# Altium PCB Copy of PCB_First.PcbDoc
Units mm, origin at the board's own origin, x right, y up, seen from the top; angles counter-clockwise.
Board outline 52 x 30 mm, 4 copper layers (Top Layer, Signal Layer 1, Signal Layer 2, Bottom Layer), stack 0.778 mm thick; 61 components, 52 nets, 200 pads, 186 vias.
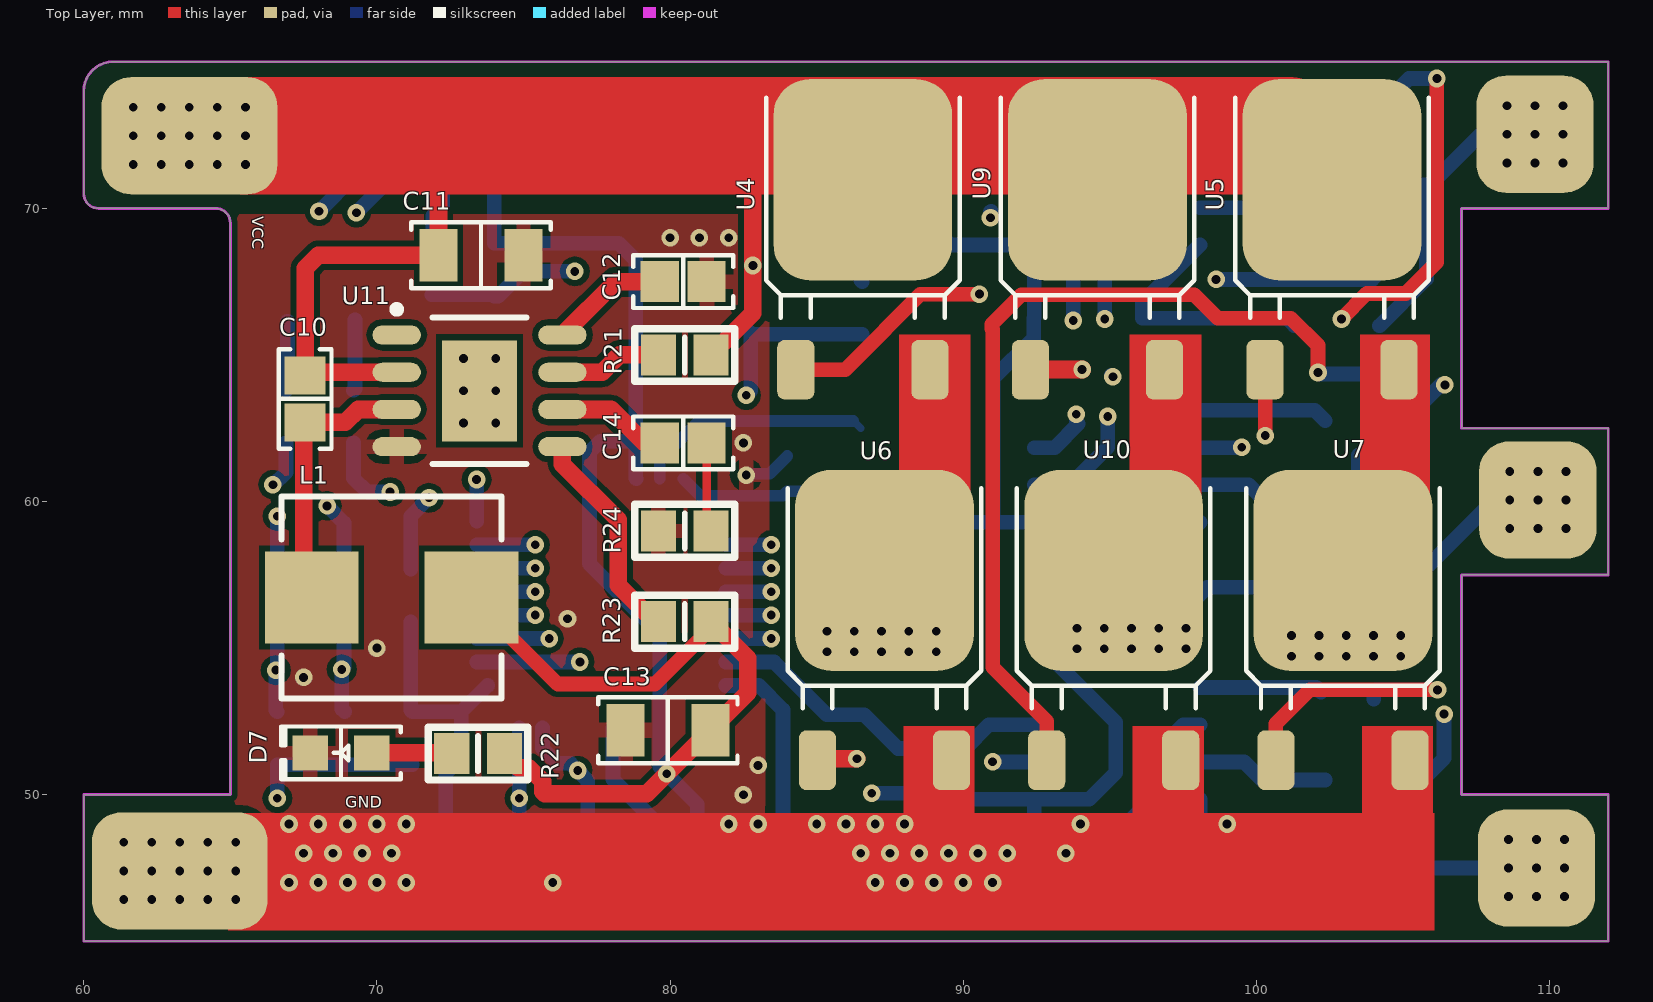
[diagram p0: Top Layer view]
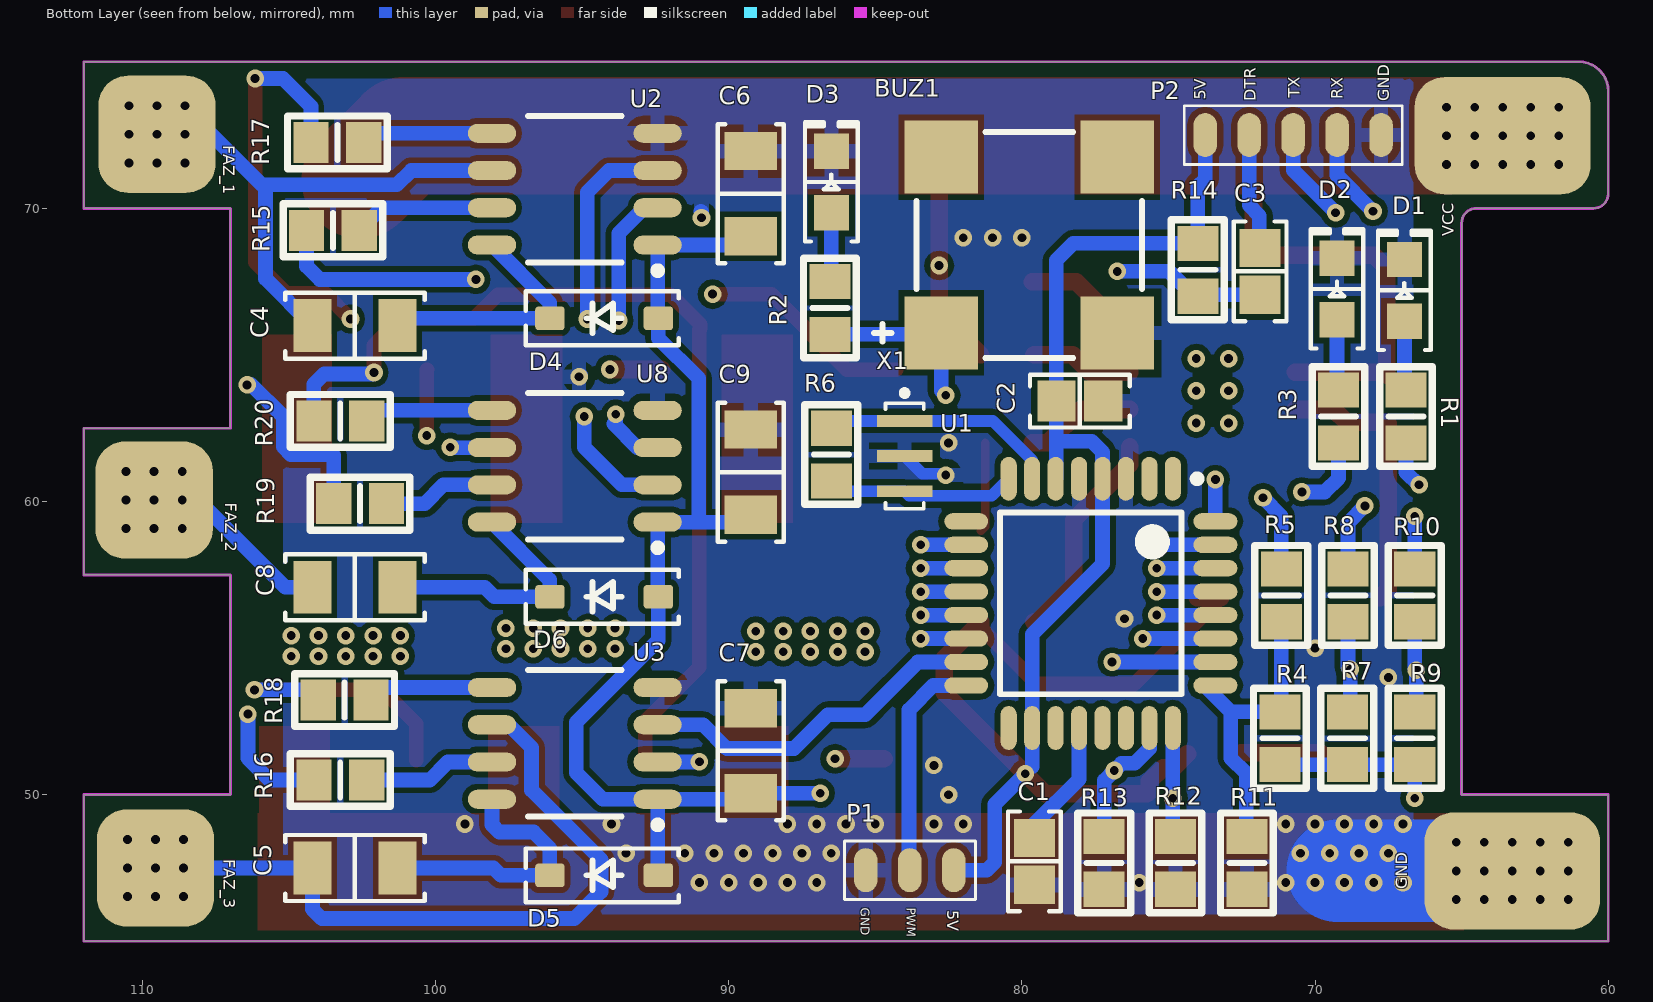
[diagram p1: Bottom Layer view, seen from below]
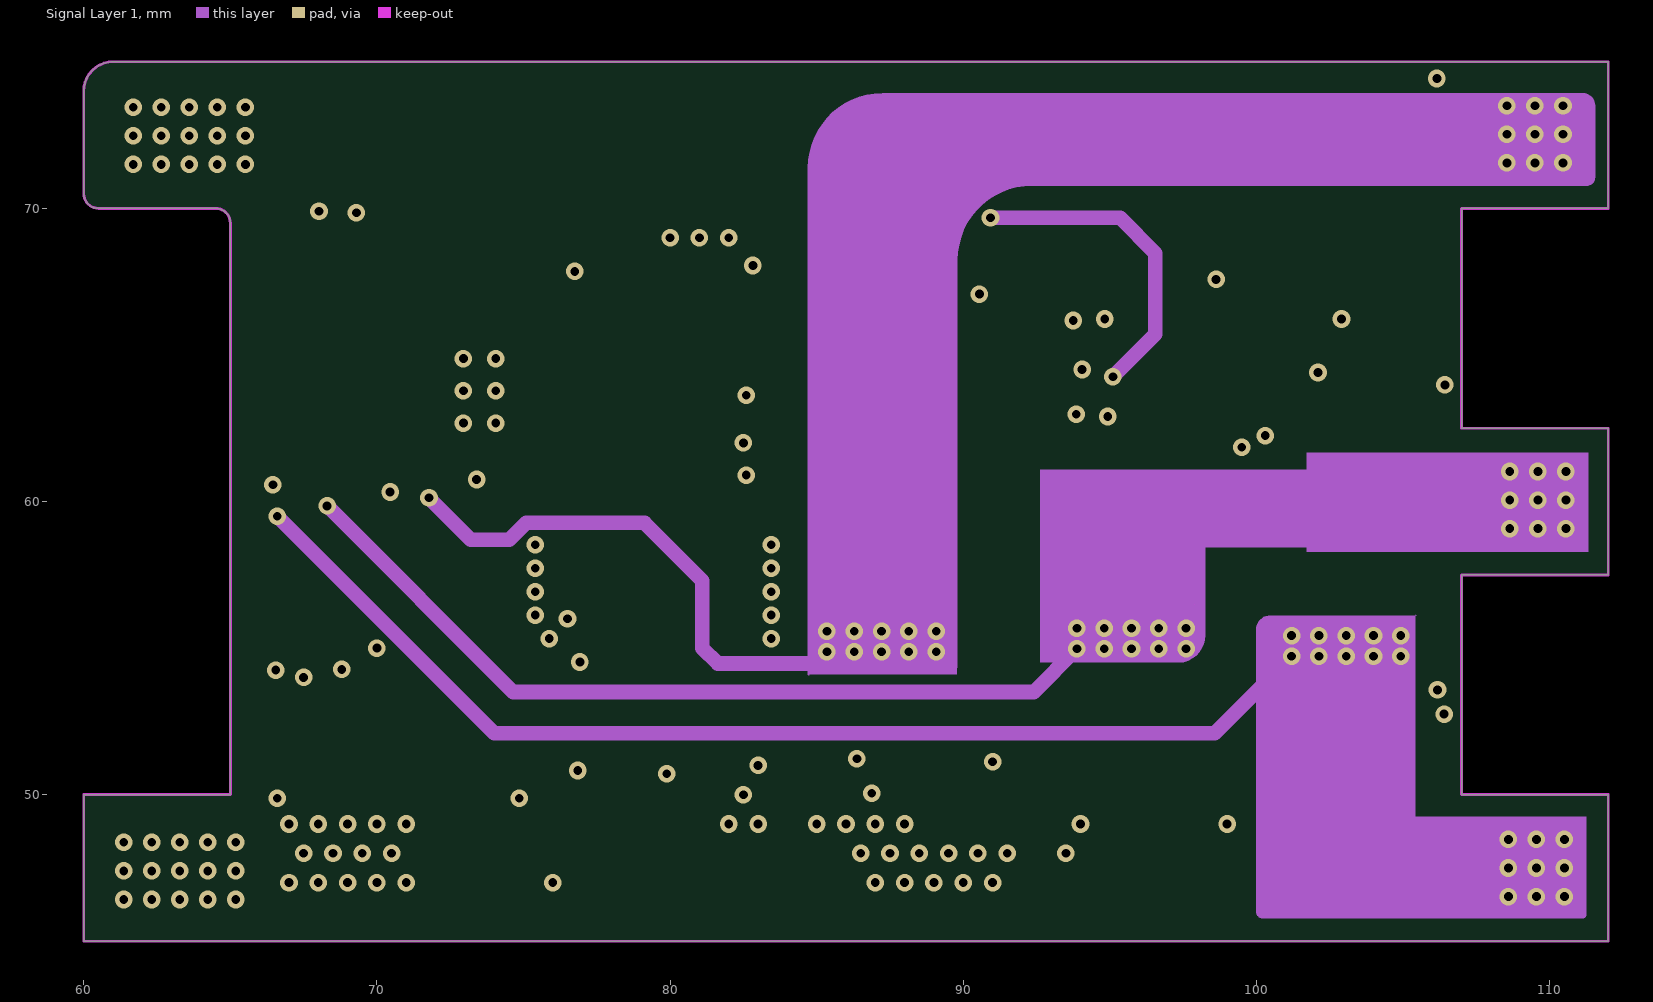
[diagram p2: Signal Layer 1]
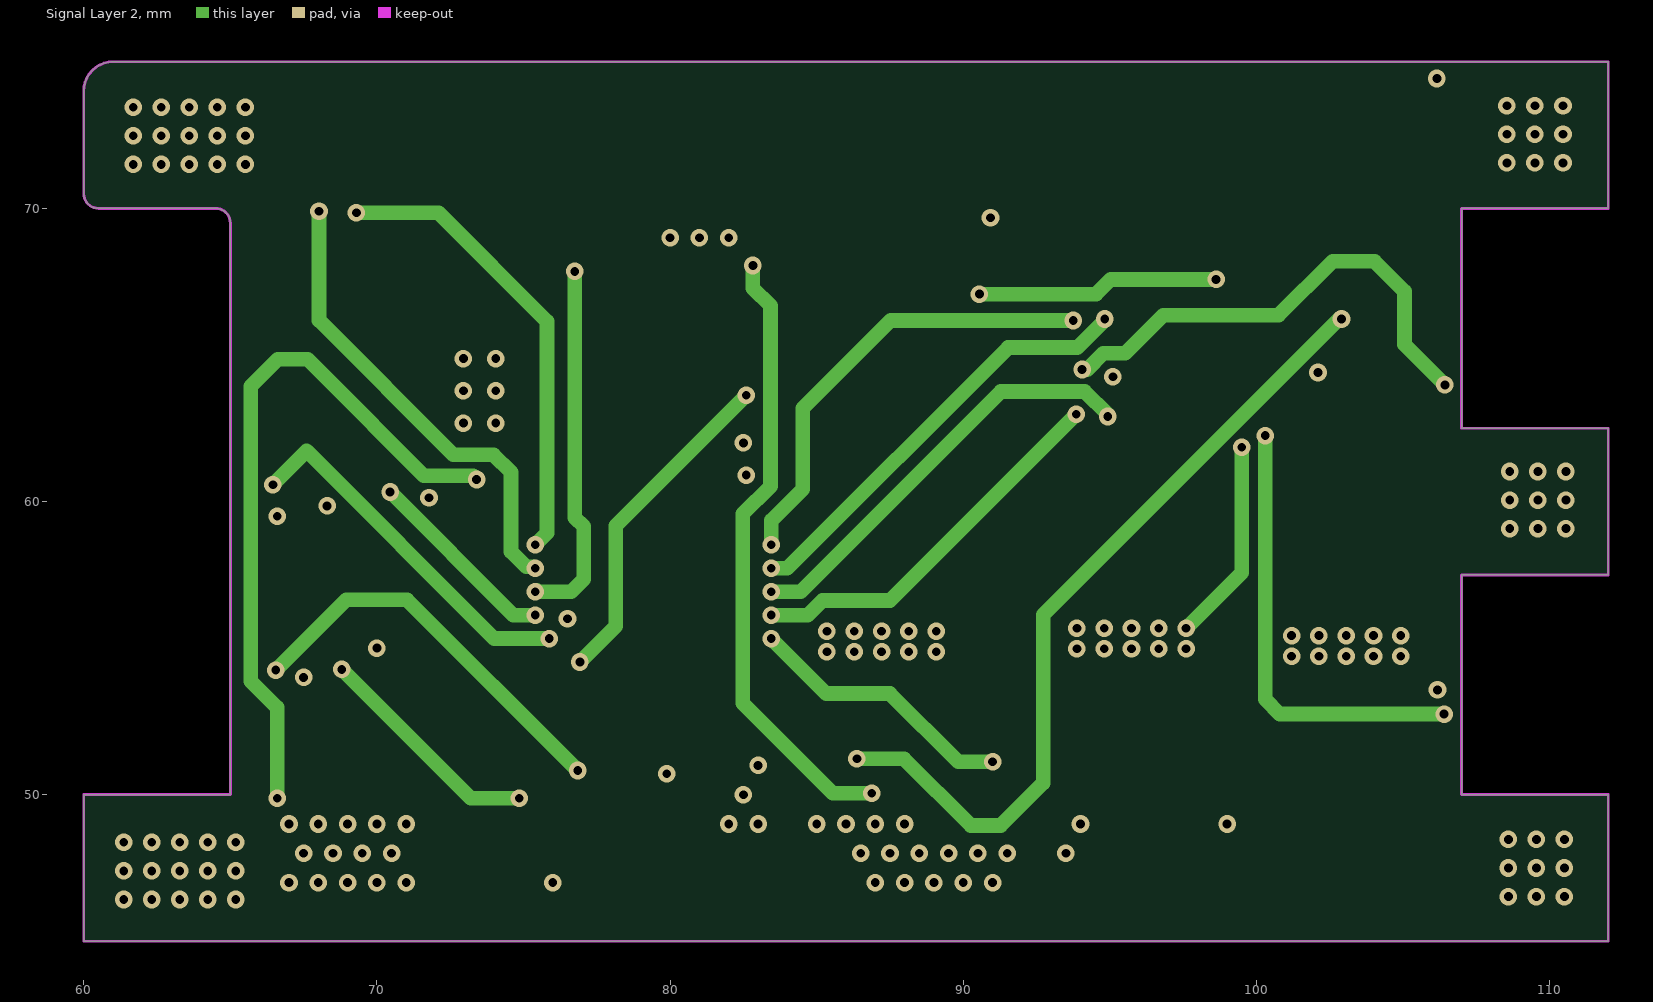
[diagram p3: Signal Layer 2]

## Layer stack, top to bottom
Top Solder: solder mask 0.0102, Solder Resist, Dk 3.5
Top Layer: signal copper 0.0356
Dielectric 1: core 0.254, FR-4, Dk 4.2
Signal Layer 1: signal copper 0.036
Dielectric 3: prepreg 0.127, Dk 4.2
Signal Layer 2: signal copper 0.036
Dielectric 2: core 0.254, Dk 4.2
Bottom Layer: signal copper 0.0356
Bottom Solder: solder mask 0.0102, Solder Resist, Dk 3.5

## Board outline
60,45 60,50 65,50 65,69.5 ccw(c64.5,69.5) 64.5,70 60.5,70 cw(c60.5,70.5) 60,70.5 60,74 cw(c61,74) 61,75 112,75 112,70 107,70 107,62.5 112,62.5 112,57.5 107,57.5 107,50 112,50 112,45

## Design rules (kind name [scope] priority, off if disabled: settings)
Clearance [All] p1: gap=0.2 ignorepadtopadclearanceinfootprint=FALSE except(0: Arc-Hole Track-Hole SMDPad-Hole THPad-Hole Via-Hole Fill-Hole Poly-Hole Region-Hole Text-Hole)
PolygonConnect [All] p1: connectstyle=Relief reliefconductorwidth=0.5 reliefentries=4 polygonreliefangle="90 Angle" airgapwidth=0.254
RoutingVias [All] p1: holewidth=0.3 width=0.6 viastyle="Through Hole" minholewidth=0.25 minwidth=0.5 maxholewidth=2.5 maxwidth=5
SolderMaskExpansion [All] p1: expansion=0.102
Width [All] p1: maxlimit=10 minlimit=0.1 preferedwidth=0.3 midlayer1_minwidth=0.254 midlayer1_prefwidth=0.254 midlayer2_minwidth=0.254 midlayer2_prefwidth=0.254 minimp=50.000000 maximp=50.000000 favimp=50.000000
30 further rules are at their usual default settings.

## Classes and differential pairs
component class Power: C10 C11 C12 C13 C14 D7 L1 R21 R22 R23 R24 U11
component class Driver: C4 C5 C6 C7 C8 C9 D4 D5 D6 R15 R16 R17 R18 R19 R20 U2 U3 U4 U5 U6 U7 U8 U9 U10
component class Atmega328p: BUZ1 C1 C2 C3 D1 D2 D3 P1 P2 R1 R2 R3 R4 R5 R6 R7 R8 R9 R10 R11 R12 R13 R14 U1 X1

## Components (designator, comment, footprint, x,y, rotation, side; value= is the part's Value field where it differs from the comment)
BUZ1 "BUZZER MAGN 3.6V 7.5X7.5MM SMD" "BUZ: CMT-7525" 79.75,68.75 r180 bottom
C1 "CAP CER 0.1UF 50V X7R 0805" "CAP 0805/2012" 79.575,47.727 r90 bottom
C2 "CAP CER 0.1UF 50V X7R 0805" "CAP 0805/2012" 78.025,63.425 r0 bottom
C3 "CAP CER 0.1UF 50V X7R 0805" "CAP 0805/2012" 71.875,67.852 r270 bottom
C4 "CAP CER 2.2UF 50V X5R 1206" "CAP 1206/3216" 102.75,66 r180 bottom
C5 "CAP CER 2.2UF 50V X5R 1206" "CAP 1206/3216" 102.75,47.5 r180 bottom
C6 "CAP CER 10UF 50V X5R 1206" "CAP 1206/3216" 89.25,70.5 r270 bottom
C7 "CAP CER 10UF 50V X5R 1206" "CAP 1206/3216" 89.25,51.5 r270 bottom
C8 "CAP CER 2.2UF 50V X5R 1206" "CAP 1206/3216" 102.75,57.075 r180 bottom
C9 "CAP CER 10UF 50V X5R 1206" "CAP 1206/3216" 89.25,61 r270 bottom
C10 "CAP CER 10000PF 50V X7R 0805" "CAP 0805/2012" 67.55,63.5 r90 top
C11 "CAP CER 10UF 50V X5R 1206" "CAP 1206/3216" 73.55,68.4 r180 top
C12 "CAP CER 0.1UF 50V X7R 0805" "CAP 0805/2012" 80.448,67.5 r180 top
C13 "CAP CERAMIC 22UF 16V X7S 20% PAD" "CAP 1206/3216" 79.925,52.2 r0 top
C14 "CAP CER 3900PF 50V X7R 0805" "CAP 0805/2012" 80.448,62 r180 top
D1 "Red 645nm LED Indication - Discrete 1.8V 0805" "SMD: LED 0805/2012 RED" 66.952,67.2 r90 bottom
D2 "Red 645nm LED Indication - Discrete 1.8V 0805" "SMD: LED 0805/2012 RED" 69.252,67.25 r90 bottom
D3 "Red 645nm LED Indication - Discrete 1.8V 0805" "SMD: LED 0805/2012 RED" 86.5,70.9 r90 bottom
D4 "1N4148 Diyot" SOD-123 94.25,66.25 r0 bottom
D5 "1N4148 Diyot" SOD-123 94.25,47.25 r0 bottom
D6 "1N4148 Diyot" SOD-123 94.25,56.75 r0 bottom
D7 "Red 645nm LED Indication - Discrete 1.8V 0805" "SMD: LED 0805/2012 RED" 68.775,51.425 r180 top
L1 "FIXED IND 10UH 4A 68 MOHM SMD" ASPI-0630LR-100M-T15 70.5,56.725 r0 top
P1 "WR-PHD 2.54 mm Angled Socket Header" PWM_CONN 83.825,47.425 r0 bottom
P2 "WR-PHD 2.54 mm Angled Socket Header" TTL_CONN_5 70.75,72.5 r180 bottom
R1 "RES SMD 100 OHM 1% 1/8W 0805" RES_0805 66.9,62.9 r90 bottom
R2 "RES SMD 100 OHM 1% 1/8W 0805" RES_0805 86.55,66.6 r270 bottom
R3 "RES SMD 100 OHM 1% 1/8W 0805" RES_0805 69.2,62.9 r90 bottom
R4 "RES SMD 33K OHM 1% 1/8W 0805" RES_0805 71.2,51.925 r90 bottom
R5 "RES SMD 33K OHM 1% 1/8W 0805" RES_0805 71.15,56.8 r90 bottom
R6 "RES SMD 10K OHM 1% 1/8W 0805" RES_0805 86.5,61.6 r270 bottom
R7 "RES SMD 33K OHM 1% 1/8W 0805" RES_0805 68.9,51.925 r90 bottom
R8 "RES SMD 33K OHM 1% 1/8W 0805" RES_0805 68.875,56.8 r90 bottom
R9 "RES SMD 33K OHM 1% 1/8W 0805" RES_0805 66.6,51.925 r90 bottom
R10 "RES SMD 33K OHM 1% 1/8W 0805" RES_0805 66.6,56.8 r90 bottom
R11 "RES SMD 10K OHM 1% 1/8W 0805" RES_0805 72.325,47.675 r90 bottom
R12 "RES SMD 10K OHM 1% 1/8W 0805" RES_0805 74.759,47.675 r90 bottom
R13 "RES SMD 10K OHM 1% 1/8W 0805" RES_0805 77.193,47.675 r90 bottom
R14 "RES SMD 10K OHM 1% 1/8W 0805" RES_0805 74,67.904 r90 bottom
R15 "RES SMD 100 OHM 1% 1/8W 0805" RES_0805 103.5,69.25 r0 bottom
R16 "RES SMD 100 OHM 1% 1/8W 0805" RES_0805 103.25,50.5 r0 bottom
R17 "RES SMD 100 OHM 1% 1/8W 0805" RES_0805 103.35,72.25 r0 bottom
R18 "RES SMD 100 OHM 1% 1/8W 0805" RES_0805 103.1,53.225 r0 bottom
R19 "RES SMD 100 OHM 1% 1/8W 0805" RES_0805 102.575,59.925 r0 bottom
R20 "RES SMD 100 OHM 1% 1/8W 0805" RES_0805 103.25,62.75 r0 bottom
R21 "RES SMD 100K OHM 1% 1/8W 0805" RES_0805 80.5,65 r0 top
R22 "RES SMD 100K OHM 1% 1/8W 0805" RES_0805 73.45,51.4 r180 top
R23 "RES SMD 44.2K OHM 1% 1/8W 0805" RES_0805 80.5,55.9 r0 top
R24 "RES SMD 6.8K OHM 1% 1/8W 0805" RES_0805 80.5,59 r0 top
U1 "IC MCU 8BIT 32KB FLASH 32TQFP" TQFP32 77.65,56.525 r270 bottom
U2 "IC GATE DRVR HALF-BRIDGE 8SOIC" SOIC8 95.25,70.655 r0 bottom
U3 "IC GATE DRVR HALF-BRIDGE 8SOIC" SOIC8 95.25,51.75 r0 bottom
U4 "MOSFET N-CH 30V 161A DPAK" DPAK 86.589,68.498 r90 top
U5 "MOSFET N-CH 30V 161A DPAK" DPAK 102.589,68.498 r90 top
U6 "MOSFET N-CH 30V 161A DPAK" DPAK 87.325,55.175 r90 top
U7 "MOSFET N-CH 30V 161A DPAK" DPAK 102.964,55.175 r90 top
U8 "IC GATE DRVR HALF-BRIDGE 8SOIC" SOIC8 95.25,61.202 r0 bottom
U9 "MOSFET N-CH 30V 161A DPAK" DPAK 94.589,68.498 r90 top
U10 "MOSFET N-CH 30V 161A DPAK" DPAK 95.145,55.175 r90 top
U11 "IC REG BUCK ADJUSTABLE 3A 8SOIC" SOIC8_PAD 73.5,63.775 r0 top
X1 "CERAMIC RES 16.0000MHZ 15PF SMD" CRYSTAL_16MHZ(CTSE16) 84,61.55 r270 bottom

## Footprints (in the part's own frame and the unit in brackets; to place one, negate y for a bottom-side part, rotate by r counter-clockwise, add the part's x,y. Pads: shape width x height; smd on the part's side, far side on the other; paste and mask are expansions set on the pad)
ASPI-0630LR-100M-T15 [mm]
  rect 3.2x3.15 smd: 1(-2.725,0) 2(2.725,0)
  silkscreen extent -3.75,-3.45 3.75,3.45, body extent -3.6,-3.32 3.6,3.33, height 3
"BUZ: CMT-7525" [mm]
  rect 2.5x2.5 smd: 0(-3,3) 0(3,3) 1(-3,-3) 2(3,-3)
  silkscreen extent -5.3,-3.85 3.85,3.85, body extent -3.75,-3.75 3.75,3.75, height 2.5
"CAP 0805/2012" [mm] "Chip Capacitor, 2-Leads, Body 2.00x1.20mm, IPC Medium Density"
  rect 1.3x1.4 smd: 1(-0.8,0) 2(0.8,0)
  silkscreen extent -1.7,-0.9 1.7,0.9, body extent -1,-0.64 1,0.64, height 1.26
"CAP 1206/3216" [mm] "Chip Capacitor, 2-Leads, Body 3.25x1.60mm, IPC Medium Density"
  rect 1.3x1.8 smd: 1(-1.45,0) 2(1.45,0)
  silkscreen extent -2.37,-1.12 2.37,1.12, body extent -1.6,-0.81 1.6,0.81, height 1.62
CRYSTAL_16MHZ(CTSE16) [mm]
  rect 0.4x1.9 smd: 1(-1.2,0) 2(0,0) 3(1.2,0)
  silkscreen extent -2.25,-0.65 1.8,0.65, body extent -1.6,-0.65 1.6,0.65, height 0.9
DPAK [mil] "D-PAK, 3-Pads, Body 6,47x6,54mm (max), IPC Medium Density"
  rrect40% 80x50 smd: 1(-157.48,90.55) 3(-157.48,-89.45)
  rrect40% 270x240 smd: 4(97.52,0.55)
  silkscreen extent -87,-129 208,131, body extent -174,-128 217,129, height 91
PWM_CONN [mm]
  oval 0.8x1.5 smd: 1(-1.5,0) 2(0,0) 3(1.5,0)
  silkscreen extent -2.25,-1 2.22,1
RES_0805 [mm]
  rect 1.2x1.4 smd: 1(-0.9,0) 2(0.9,0)
  silkscreen extent -1.7,-0.9 1.7,0.9, body extent -1.05,-0.67 1.05,0.68, height 0.6
"SMD: LED 0805/2012 RED" [mm] "Chip Diode, 2-Leads, Body 2.00x1.25mm, IPC Medium Density"
  rect 1.2x1.2 smd: 1(-1.05,0) 2(1.05,0)
  silkscreen extent -2.03,-0.9 2.03,0.9, body extent -1,-0.63 1,0.63, height 0.9
SOD-123 [mm] "SOD, 2-Leads, Body 1.55x3.70mm, IPC Medium Density"
  rrect25% 1x0.8 smd: 1(-1.85,0) 2(1.85,0)
  silkscreen extent -2.54,-0.92 2.67,0.92, body extent -1.95,-0.9 1.95,0.9, height 1.18
SOIC8 [mm] "SOIC, 8-Leads, Body 4,90x3,90mm, Pitch 1,27mm, Thermal Pad 3,45x2,56mm, IPC Low Density"
  oval 1.65x0.65 smd: 1(-2.825,1.905) 2(-2.825,0.635) 3(-2.825,-0.635) 4(-2.825,-1.905) 5(2.825,-1.905) 6(2.825,-0.635) 7(2.825,0.635) 8(2.825,1.905)
  silkscreen extent -2.95,-2.5 1.6,2.9, body extent -3,-2.5 3,2.5, height 1.7
SOIC8_PAD [mm] "SOIC, 8-Leads, Body 4,90x3,90mm, Pitch 1,27mm, Thermal Pad 3,45x2,56mm, IPC Low Density"
  oval 1.65x0.65 smd: 1(-2.825,1.905) 2(-2.825,0.635) 3(-2.825,-0.635) 4(-2.825,-1.905) 5(2.825,-1.905) 6(2.825,-0.635) 7(2.825,0.635) 8(2.825,1.905)
  rect 2.56x3.45 smd: 9(0,0)
  silkscreen extent -2.95,-2.5 1.6,2.9, body extent -3,-2.5 3,2.5, height 1.7
TQFP32 [mm] "TQFP, 32-Leads, Body 7,00x7,00mm, Pitch 0,80mm, IPC Medium Density"
  oval 1.5x0.55 smd: 1(-4.25,2.8) 2(-4.25,2) 3(-4.25,1.2) 4(-4.25,0.4) 5(-4.25,-0.4) 6(-4.25,-1.2) 7(-4.25,-2) 8(-4.25,-2.8) 17(4.25,-2.8) 18(4.25,-2) 19(4.25,-1.2) 20(4.25,-0.4) 21(4.25,0.4) 22(4.25,1.2) 23(4.25,2) 24(4.25,2.8)
  oval 0.55x1.5 smd: 9(-2.8,-4.25) 10(-2,-4.25) 11(-1.2,-4.25) 12(-0.4,-4.25) 13(0.4,-4.25) 14(1.2,-4.25) 15(2,-4.25) 16(2.8,-4.25) 25(2.8,4.25) 26(2,4.25) 27(1.2,4.25) 28(0.4,4.25) 29(-0.4,4.25) 30(-1.2,4.25) 31(-2,4.25) 32(-2.8,4.25)
  silkscreen extent -4.37,-3.1 3.1,3.75, body extent -4.51,-4.51 4.51,4.51, height 1
TTL_CONN_5 [mm]
  oval 0.8x1.5 smd: 1(-3,0) 2(-1.5,0) 3(0,0) 4(1.5,0) 5(3,0)
  silkscreen extent -3.71,-1 3.72,1

## Part data
BUZ1: library part Buzzer(CMT-7525-80-SMT-TR), "Buzzers Transducer, Externally Driven Magnetic 3.6V 100mA 2.73kHz 80dB @ 3.6V, 10cm Surface Mount Solder Pads", +Sicaklik=+85, -Sicaklik=-40, Cins=Buzzer, Deger=Buzzer, Kýlýf=Nonstandard, Lehim Yöntemi=SMD, MSL="1 (Unlimited)", Uretici Kodu=CMT-7525-80-SMT-TR
C1 C2 C3 C12: library part "100nF 50V 0805", "0.1µF ±10% 50V Ceramic Capacitor X7R 0805 (2012 Metric)", +Sicaklik=+125, -Sicaklik=-55, Cins=Kondansator, Deger="100nF 50V", Kýlýf=0805, Lehim Yöntemi=SMD, MSL="1 (Unlimited)", Uretici Kodu=CL21B104KBCNNNC
C4 C5 C8: library part "2.2uF 50V 1206", "2.2µF ±10% 50V Ceramic Capacitor X5R 1206 (3216 Metric)", +Sicaklik=+85, -Sicaklik=-55, Cins=Kondansator, Deger="2.2uF 50V", Kýlýf=1206, Lehim Yöntemi=SMD, MSL="1 (Unlimited)", Uretici Kodu=CL31A225KBHNNNE
C6 C7 C9 C11: library part "10uF 50V 1206", "10µF ±10% 50V Ceramic Capacitor X5R 1206 (3216 Metric)", +Sicaklik=+125, -Sicaklik=-55, Cins=Kondansator, Deger="10uF 50V", Kýlýf=1206, Lehim Yöntemi=SMD, MSL="1 (Unlimited)", Uretici Kodu=CL31A106KBHNNNE
C10: library part "10nF 50V 0805", "10000pF ±10% 50V Ceramic Capacitor X7R 0805 (2012 Metric)", +Sicaklik=+125, -Sicaklik=-55, Cins=Kondansator, Deger="10nF 50V", Kýlýf=0805, Lehim Yöntemi=SMD, MSL="1 (Unlimited)", Uretici Kodu=CL21B103KBANNNC
C13: library part "22uF 16V 1206", "22µF ±20% 16V Ceramic Capacitor X7S 1206 (3216 Metric)", +Sicaklik=+125, -Sicaklik=-55, Cins=Kondansator, Deger="22uF 16V", Kýlýf=1206, Lehim Yöntemi=SMD, MSL="1 (Unlimited)", Uretici Kodu=GRM31CC71C226ME11L
C14: library part "3.9nF 50V 0805", "3900pF ±10% 50V Ceramic Capacitor X7R 0805 (2012 Metric)", +Sicaklik=+125, -Sicaklik=-55, Cins=Kondansator, Deger="3.9nF 50V", Kýlýf=0805, Lehim Yöntemi=SMD, MSL="1 (Unlimited)", Uretici Kodu=CL21B392KBANNNC
D1 D2 D3 D7: library part LED_Kýrmýzý, "LED RED DIFFUSED 0805 SMD", +Sicaklik=+125, -Sicaklik=-40, Cins=LED, Deger="KIRMIZI LED", Kýlýf=0805, Lehim Yöntemi=SMD, MSL="1 (Unlimited)", Uretici Kodu="LH R974-LP-1"
D4 D5 D6: library part 1N4148, "DIODE GEN PURP 100V 150MA SOD123", +Sicaklik=+150, -Sicaklik=-65, Cins=Diyot, Deger=1N4148, Kýlýf=SOD123, Lehim Yöntemi=SMD, MSL="1 (Unlimited)", Uretici Kodu=1N4148W-TP
L1: library part "10uH 4A", "10µH Shielded Molded Inductor 4A 68mOhm Max Nonstandard", +Sicaklik=+125, -Sicaklik=-55, Cins=Bobin, Deger="10uH 4A", Kýlýf=Nonstandard, Lehim Yöntemi=SMD, MSL="1 (Unlimited)", Uretici Kodu=ASPI-0630LR-100M-T15
P1: library part HDR(1X3), +Sicaklik=+105, -Sicaklik=-40, Cins=Konnektor, Kýlýf="3POS 2.54MM", Lehim Yöntemi=MANUEL, MSL="1 (Unlimited)", Uretici Kodu=613003143121
P2: library part HDR(1X5), +Sicaklik=+105, -Sicaklik=-40, Cins=Konnektor, Kýlýf="5POS 2.54MM", Lehim Yöntemi=MANUEL, MSL="1 (Unlimited)", Uretici Kodu=613005143121
R1 R2 R3 R15 R16 R17 R18 R19 R20: library part "100R 0805", "100 Ohms ±1% 0.125W, 1/8W Chip Resistor 0805 (2012 Metric) Moisture Resistant Thick Film", +Sicaklik=+155, -Sicaklik=-55, Cins=Direnc, Deger=100R, Kýlýf=0805, Lehim Yöntemi=SMD, MSL="1 (Unlimited)", Uretici Kodu=RC0805FR-07100RL
R4 R5 R7 R8 R9 R10: library part "33K 0805", "33 kOhms ±1% 0.125W, 1/8W Chip Resistor 0805 (2012 Metric) Moisture Resistant Thick Film", +Sicaklik=+155, -Sicaklik=-55, Cins=Direnc, Deger=33K, Kýlýf=0805, Lehim Yöntemi=SMD, MSL="1 (Unlimited)", Uretici Kodu=RC0805FR-0733KL
R6 R11 R12 R13 R14: library part "10K 0805", "10 kOhms ±1% 0.125W, 1/8W Chip Resistor 0805 (2012 Metric) Moisture Resistant Thick Film", +Sicaklik=+155, -Sicaklik=-55, Cins=Direnc, Deger=10K, Kýlýf=0805, Lehim Yöntemi=SMD, MSL="1 (Unlimited)", Uretici Kodu=RC0805FR-0710KL
R21 R22: library part "100K 0805", "100 kOhms ±1% 0.125W, 1/8W Chip Resistor 0805 (2012 Metric) Moisture Resistant Thick Film", +Sicaklik=+155, -Sicaklik=-55, Cins=Direnc, Deger=100K, Kýlýf=0805, Lehim Yöntemi=SMD, MSL="1 (Unlimited)", Uretici Kodu=RC0805FR-07100KL
R23: library part "44.2K 0805", "44.2 kOhms ±1% 0.125W, 1/8W Chip Resistor 0805 (2012 Metric) Moisture Resistant Thick Film", +Sicaklik=+155, -Sicaklik=-55, Cins=Direnc, Deger=44.2K, Kýlýf=0805, Lehim Yöntemi=SMD, MSL="1 (Unlimited)", Uretici Kodu=RC0805FR-0744K2L
R24: library part "6.8K 0805", "6.8 kOhms ±1% 0.125W, 1/8W Chip Resistor 0805 (2012 Metric) Moisture Resistant Thick Film", +Sicaklik=+155, -Sicaklik=-55, Cins=Direnc, Deger=6.8K, Kýlýf=0805, Lehim Yöntemi=SMD, MSL="1 (Unlimited)", Uretici Kodu=RC0805FR-076K8L
U1: library part ATMEGA328P, "AVR AVR® ATmega Microcontroller IC 8-Bit 20MHz 32KB (16K x 16) FLASH 32-TQFP (7x7)", +Sicaklik=+85, -Sicaklik=-40, Cins=IC, Deger=ATMEGA328P, Kýlýf=32-TQFP, Lehim Yöntemi=SMD, MSL="3 (168 Hours)", Uretici Kodu=RC0805FR-07100RL
U2 U3 U8: library part IR2101, "Half-Bridge Gate Driver IC Non-Inverting 8-SOIC", +Sicaklik=+150, -Sicaklik=-40, Cins=IC, Deger=IR2101STRPBF, Kýlýf=8-SOIC, Lehim Yöntemi=SMD, MSL="2A (4 Weeks)", Uretici Kodu=IR2101STRPBF
U4 U5 U6 U7 U9 U10: library part IRLR7843, "N-Channel 30V 161A (Tc) 140W (Tc) Surface Mount D-Pak", +Sicaklik=+175, -Sicaklik=-55, Cins=MOSFET, Deger=IRLR7843TRPBF, Kýlýf=DPAK(TO-252-3), Lehim Yöntemi=SMD, MSL="1 (Unlimited)", Uretici Kodu=IRLR7843TRPBF
U11: library part MP2307DN, "Buck Switching Regulator IC Positive Adjustable 0.925V 1 Output 3A 8-SOIC (0.154\", 3.90mm Width) Exposed Pad", +Sicaklik=+85, -Sicaklik=-40, Cins=IC, Deger=MP2307DN, Kýlýf=8-SOIC, Lehim Yöntemi=SMD, MSL="2A (4 Weeks)", Uretici Kodu=MP2307DN-LF-Z
X1: library part "CRYSTAL 16.0000MHZ(CSTCE16M0V53-R0)", "16MHz Ceramic Resonator Built in Capacitor 15pF ±0.3%  -20°C ~ 80°C Surface Mount", +Sicaklik=+80, -Sicaklik=-20, Cins=Kristal, Deger="16 MHZ 15PF", Kýlýf=3-SMD, Lehim Yöntemi=SMD, MSL="1 (Unlimited)", Uretici Kodu=CSTCE16M0V53-R0

## Free pads (board coordinates)
  rrect50% 6x4 smd: ""(63.275,47.4) ""(63.6,72.475)
  rrect50% 6x4 smd far side: ""(63.275,47.4) ""(63.6,72.475)
  rrect50% 4x4 smd: ""(109.5,72.525) ""(109.55,47.5) ""(109.6,60.05)
  rrect50% 4x4 smd far side: ""(109.5,72.525) ""(109.55,47.5) ""(109.6,60.05)

## Via types
v1: diameter 0.6, hole 0.3, Top Layer to Bottom Layer, tented both sides, 136 vias
v2: diameter 0.6, hole 0.3, Top Layer to Bottom Layer, 50 vias

## Nets (pads, with @x,y where several pads share a name; then routed paths per layer and width w, separated by ;. In a path a pad name is that pad's centre, name@x,y a point inside that pad or via, vN(x,y) a via of type N, cw(c..) or ccw(c..) an arc to the next point about the centre after c; other vN are vias at no path point)
+5V: C2.2 C13.2 L1.2 P1.1 P2.1 R14.2 R22.1 R23.2 U1.4 U1.6 U1.18 | length 59.4
  Top Layer w0.5: L1.2 76.175,53.775 79.482,53.775 R23.2@81.4,55.693
  Top Layer w0.6: L1.2 L1.2@74.025,56.725 ; R22.1 74.825,50.925 75.181,50.925 75.654,50.453 75.654,50.096 75.725,50.025 79.2,50.025 v1(79.887,50.712) C13.2 82.65,53.475 82.65,54.65 R23.2 R23.2@81.4,55.693
  Bottom Layer w0.5: P2.1 73.75,71 74,70.75 R14.2 78.246,68.804 78.825,68.225 C2.2 78.825,62.05 ; U1.6 78.825,60.8 78.825,62.05 ; 79.65,50.95 U1.18 79.65,55.475 77.25,57.875 U1.4 77.25,61.675 77.625,62.05 78.825,62.05 ; v1(79.887,50.712) 80.925,49.675 80.925,47.7 81.2,47.425 P1.1
A0: R9.2 R10.1 R13.2 U1.23 | length 21.5
  Signal Layer 2 w0.5: v1(66.55,54.25) 68.95,56.65 71.025,56.65 v1(76.85,50.825)
  Bottom Layer w0.5: R9.2 66.55,52.875 v1(66.55,54.25) 66.6,54.3 R10.1@66.6,55.85 ; R10.1 R10.1@66.6,55.85 ; R10.1@66.65,55.9 R10.1@66.6,55.85 ; U1.23 75.65,51.575 76.15,51.075 76.6,51.075 v1(76.85,50.825) 77.193,50.482 R13.2
A1: R7.2 R8.1 R12.2 U1.24 | length 15
  Signal Layer 2 w0.5: v1(68.8,54.275) 73.198,49.877 v1(74.854,49.877)
  Bottom Layer w0.5: R8.1 R8.1@68.875,55.875 ; R7.2 68.8,52.925 v1(68.8,54.275) 68.875,54.35 R8.1@68.875,55.875 ; R8.1@68.9,55.9 R8.1@68.875,55.875 ; R12.2 74.85,48.666 v1@74.85,50.125 ; U1.24 v1@74.85,50.125 ; v1(74.854,49.877) 74.854,50.121 v1@74.85,50.125
A2: R4.2 R5.1 R11.2 U1.25 | length 10.5
  Bottom Layer w0.5: R5.1 71.15,52.875 R4.2 72.875,52.825 ; R11.2 72.35,48.575 72.35,50.725 72.875,51.25 72.875,52.825 ; U1.25@73.775,53.725 72.875,52.825
BUZZ: BUZ1.1 R2.2 U1.26 | length 21
  Signal Layer 2 w0.5: v1(76.925,54.525) 78.15,55.75 78.15,59.175 v1(82.6,63.625)
  Bottom Layer w0.5: U1.26 v1(76.925,54.525) ; v1(82.6,63.625) 82.75,63.775 BUZ1.1 82.8,65.7 R2.2
DTR: C3.1 P2.2 | length 4
  Bottom Layer w0.5: C3.1 71.9,68.677 71.9,69.75 72.25,70.1 P2.2
FAZ_1: C4.1 pad.@109.5,72.525 R5.2 U2.6 U4.3 U6.4 | length 38.2
  Signal Layer 1 w0.5: v1(71.775,60.125) 73.2,58.7 74.514,58.7 75.089,59.275 79.125,59.275 81.1,57.3 81.1,55 81.625,54.475 84.95,54.475 v1(85.35,54.875)
  Bottom Layer w0.5: R5.2 71.15,59.5 v1(71.775,60.125) ; U2.6 100.835,71.29 101.325,70.8 105.925,70.8 107.65,72.525 v1(108.544,72.525) v1(109.5,72.525) ; C4.1 105.8,67.6 105.8,70.575
  other v1: 86.281,54.875 87.213,54.875 88.144,54.875 89.075,54.875 85.35,55.575 86.281,55.575 87.213,55.575 88.144,55.575 89.075,55.575 108.544,71.55 109.5,71.55 110.456,71.55 110.456,72.525 108.544,73.5 109.5,73.5 110.456,73.5
FAZ_2: C8.1 pad.@109.6,60.05 R8.2 U8.6 U9.3 U10.4 | length 46.1
  Signal Layer 1 w0.5: v1(68.3,59.85) 74.65,53.5 92.4,53.5 v1(93.875,54.975)
  Signal Layer 2 w0.5: v1(97.6,55.675) 99.5,57.575 v1(99.5,61.85)
  Bottom Layer w0.5: v1(68.3,59.85) 68.875,59.275 R8.2 ; U8.6 99.487,61.837 v1(99.5,61.85) ; C8.1 105.125,57.075 108.1,60.05 pad.@108.5,60.05 ; v1(108.644,60.05) v1(109.6,60.05)
  other v1: 94.806,54.975 95.737,54.975 96.669,54.975 97.6,54.975 93.875,55.675 94.806,55.675 95.737,55.675 96.669,55.675 108.644,59.075 109.6,59.075 110.556,59.075 110.556,60.05 108.644,61.025 109.6,61.025 110.556,61.025
FAZ_3: C5.1 pad.@109.55,47.5 R10.2 U3.6 U5.3 U7.4 | length 65.2
  Signal Layer 1 w0.5: v1(66.6,59.5) 74,52.1 98.575,52.1 v1(101.2,54.725)
  Bottom Layer w0.5: R10.2 v1(66.6,59.5) ; U3.6 97.51,52.385 96.725,51.6 96.725,50.15 94.35,47.775 94.35,46.7 95.275,45.775 103.875,45.775 104.2,46.1 C5.1 v1(108.594,47.5) v1(109.55,47.5)
  other v1: 108.594,46.525 109.55,46.525 110.506,46.525 110.506,47.5 108.594,48.475 109.55,48.475 110.506,48.475 102.131,54.725 103.062,54.725 103.994,54.725 104.925,54.725 101.2,55.425 102.131,55.425 103.062,55.425 103.994,55.425 104.925,55.425
GND: BUZ1.2 C1.1 C2.1 C6.1 C7.1 C9.1 C11.1 C12.1 C13.1 D1.2 D2.2 D3.2 D7.2 P1.3 P2.5 pad.@63.275,47.4 R11.1 R12.1 R13.1 R24.1 U1.3 U1.5 U2.4 U3.4 U6.3 U7.3 U8.4 U10.3 U11.4 X1.2 | length 18.9
  Top Layer w0.5: v1@90.926,69.675 v1(90.929,69.678)
  Signal Layer 1 w0.5: v1(90.929,69.678) 95.347,69.678 96.552,68.473 96.552,65.7 v1(95.105,64.253)
  Bottom Layer w0.4: v1(82.6,60.9) 82.65,60.95 83.4,60.95 X1.2
  Bottom Layer w0.5: v1(90.929,69.678) 90.929,69.879 v1@90.95,69.9 ; v1@95.05,64.3 95.097,64.253 v1(95.105,64.253)
  Bottom Layer w3.5: v1(63.275,47.4) v1(64.231,47.4) v1(65.187,47.4) 69.225,47.4
  other v1: 61.363,46.425 62.319,46.425 63.275,46.425 64.231,46.425 65.187,46.425 61.363,47.4 62.319,47.4 61.363,48.375 62.319,48.375 63.275,48.375 64.231,48.375 65.187,48.375
  other v2: 67,47 68,47 69,47 70,47 71,47 76,47 87,47 88,47 89,47 90,47 91,47 67.5,48 68.5,48 69.5,48 70.5,48 86.5,48 87.5,48 88.5,48 89.5,48 90.5,48 91.5,48 93.5,48 67,49 68,49 69,49 70,49 71,49 82,49 83,49 85,49 86,49 87,49 88,49 94,49 99,49 82.5,50 83,51 67.5,54 70,55 76.5,56 82.5,62 80,69 81,69 82,69
H_1: U1.10 U2.2 | length 21.8
  Signal Layer 2 w0.5: v1(83.45,58.525) 83.45,59.35 84.525,60.425 84.525,63.175 87.525,66.175 v1(93.75,66.175)
  Bottom Layer w0.5: U1.10 v1(83.45,58.525) ; U2.2 92.88,70.02 93.75,69.15 v1(93.75,66.175)
H_2: U1.12 U8.2 | length 20.3
  Signal Layer 2 w0.5: v1(83.45,56.925) 84.45,56.925 91.275,63.75 94.143,63.75 94.925,62.968 v1(94.925,62.9)
  Bottom Layer w0.5: U1.12 v1(83.45,56.925) ; U8.2 93.642,60.567 94.925,61.85 v1(94.925,62.9)
H_3: U1.14 U3.2 | length 12.3
  Signal Layer 2 w0.5: v1(83.45,55.325) 85.325,53.45 87.5,53.45 89.825,51.125 v1(91,51.125)
  Bottom Layer w0.5: U1.14 v1(83.45,55.325) ; v1(91,51.125) 91.01,51.115 U3.2
L_1: U1.11 U2.3 | length 23.5
  Signal Layer 2 w0.5: v1(83.45,57.725) 84,57.725 91.528,65.253 93.889,65.253 94.825,66.189 v1(94.825,66.225)
  Bottom Layer w0.5: U1.11 v1(83.45,57.725) ; U2.3 94.085,71.29 94.825,70.55 v1(94.825,66.225)
L_2: U1.13 U8.3 | length 17
  Signal Layer 2 w0.5: v1(83.45,56.125) 84.7,56.125 85.2,56.625 87.502,56.625 v1(93.855,62.978)
  Bottom Layer w0.5: U1.13 v1(83.45,56.125) ; U8.3 93.113,61.837 93.925,62.65 93.855,62.72 v1(93.855,62.978)
L_3: U1.15 U3.3 | length 12.1
  Bottom Layer w0.5: U1.15 83.55,54.525 85.35,52.725 86.625,52.725 87.775,51.575 90.061,51.575 90.871,52.385 U3.3
LED_1: R1.1 U1.27 | length 16.7
  Signal Layer 2 w0.5: v1(66.45,60.575) 67.6,61.725 74,55.325 v1(75.875,55.325)
  Bottom Layer w0.5: v1(66.45,60.575) 66.45,60.55 66.9,61 R1.1 ; U1.27 v1(75.875,55.325)
LED_2: R3.1 U1.28 | length 11.3
  Signal Layer 2 w0.5: v1(70.45,60.325) 74.65,56.125 v1(75.4,56.125)
  Bottom Layer w0.5: R3.1 69.2,60.8 69.675,60.325 v1(70.45,60.325) ; U1.28 v1(75.4,56.125)
NetC1_2: C1.2 U1.20 | length 4.4
  Bottom Layer w0.5: U1.20 78.05,50.525 79.575,49 C1.2
NetC4_2: C4.2 D4.2 U2.8 | length 8.6
  Bottom Layer w0.5: U2.8 96.1,66.775 D4.2 101.05,66.25 C4.2
NetC5_2: C5.2 D5.2 U3.8 | length 9.4
  Bottom Layer w0.5: U3.8 98.075,48.975 97.825,48.725 96.65,48.725 96.1,48.175 D5.2 97.775,47.25 98.025,47.5 C5.2
NetC8_2: C8.2 D6.2 U8.8 | length 8.7
  Bottom Layer w0.5: U8.8 96.1,57.322 D6.2 98,56.75 98.325,57.075 C8.2
NetC10_1: C10.1 L1.1 U11.3 | length 9.4
  Top Layer w0.6: L1.1 67.5,57 67.5,62.65 C10.1 68.925,62.7 69.365,63.14 U11.3
NetC12_2: C12.2 U11.8 | length 4.1
  Top Layer w0.6: U11.8 78.145,67.5 C12.2
NetC14_1: C14.1 R24.2 | length 3.1
  Top Layer w0.3: C14.1 81.248,59.152 R24.2
NetC14_2: C14.2 U11.6 | length 3.8
  Top Layer w0.6: U11.6 77.985,63.14 79.125,62 C14.2
NetD1_1: D1.1 R1.2 | length 2.4
  Bottom Layer w0.5: R1.2 66.952,63.852 D1.1
NetD2_1: D2.1 R3.2 | length 2.4
  Bottom Layer w0.5: R3.2 69.252,63.852 D2.1
NetD3_1: D3.1 R2.1 | length 2.4
  Bottom Layer w0.5: D3.1 86.5,67.55 R2.1
NetD7_1: D7.1 R22.2 | length 2.7
  Top Layer w0.6: D7.1 72.525,51.425 R22.2
NetR15_1: R15.1 U2.7 | length 4.8
  Bottom Layer w0.5: U2.7 101.83,70.02 R15.1
NetR15_2: R15.2 U4.1 | length 22.8
  Top Layer w0.5: U4.1 85.973,64.498 87.35,65.875 87.35,65.886 88.539,67.075 v1(90.55,67.075)
  Signal Layer 2 w0.5: v1(90.55,67.075) 94.525,67.075 95.025,67.575 v1(98.625,67.575)
  Bottom Layer w0.5: v1(98.625,67.575) 103.95,67.575 104.4,68.025 R15.2
NetR16_1: R16.1 U3.7 | length 4.5
  Bottom Layer w0.5: U3.7 99.585,51.115 100.2,50.5 R16.1
NetR16_2: R16.2 U5.1 | length 21.6
  Top Layer w0.5: U5.1 100.3,64.487 v1(100.3,62.25)
  Signal Layer 2 w0.5: v1(100.3,62.25) 100.3,53.25 100.8,52.75 v1(106.4,52.75)
  Bottom Layer w0.5: R16.2 105.65,50.5 106.4,51.25 v1(106.4,52.75)
NetR17_1: R17.1 U2.5 | length 4.5
  Bottom Layer w0.5: U2.5 102.14,72.56 R17.1
NetR17_2: R17.2 U6.1 | length 43.5
  Top Layer w0.5: v1(102.9,66.225) 103.771,67.096 105.095,67.096 106.155,68.156 v1(106.155,74.429)
  Top Layer w0.6: U6.1@84.689,51.223 v1(86.373,51.223)
  Signal Layer 2 w0.5: v1(86.373,51.223) 87.977,51.223 90.25,48.95 91.275,48.95 92.725,50.4 92.725,56.136 102.814,66.225 v1(102.9,66.225)
  Bottom Layer w0.5: R17.2 104.25,73.475 105.204,74.429 v1(106.155,74.429)
NetR18_1: R18.1 U3.5 | length 4.2
  Bottom Layer w0.5: U3.5 102.045,53.655 R18.1@102.2,53.5
NetR18_2: R18.2 U7.1 | length 9.7
  Top Layer w0.5: U7.1 100.664,52.414 101.825,53.575 v1(106.175,53.575)
  Bottom Layer w0.5: R18.2@104,53.25 104,53.5 104.075,53.575 v1(106.175,53.575)
NetR19_1: R19.1 U8.7 | length 3.9
  Bottom Layer w0.5: U8.7 99.732,60.567 100.375,59.925 R19.1
NetR19_2: R19.2 U9.1 | length 24.7
  Top Layer w0.5: v1@106.428,63.978 v1(106.43,63.978)
  Top Layer w0.6: U9.1 92.294,64.503 v1(94.055,64.503)
  Signal Layer 2 w0.5: v1(94.055,64.503) 94.223,64.503 94.773,65.053 95.528,65.053 96.825,66.35 100.75,66.35 102.6,68.2 104.025,68.2 105.05,67.175 105.05,65.358 v1(106.43,63.978)
  Bottom Layer w0.5: R19.2 103.475,61.579 103.496,61.6 104.936,61.6 105.2,61.864 105.2,62.9 106.3,64 106.322,63.978 v1(106.43,63.978)
NetR20_1: R20.1 U8.5 | length 4.4
  Bottom Layer w0.5: U8.5 101.992,63.107 R20.1
NetR20_2: R20.2 U10.1 | length 32.3
  Top Layer w0.5: U10.1 92.845,52.506 91,54.35 91,65.875 90.975,65.9 90.975,66.05 91.975,67.05 97.875,67.05 98.675,66.25 101.175,66.25 102.1,65.325 v1(102.1,64.4)
  Bottom Layer w0.5: v1(102.1,64.4) 102.15,64.35 103.8,64.35 104.15,64 R20.2
NetR21_1: R21.1 U11.7 | length 3.5
  Top Layer w0.6: U11.7 77.685,64.41 78.275,65 R21.1
NetR23_1: R23.1 U11.5 | length 7.4
  Top Layer w0.6: U11.5 76.325,61.275 78.225,59.375 78.225,57.15 79.475,55.9 R23.1
PD2: R4.1 R7.1 R9.1 U1.32 | length 31.4
  Top Layer w0.5: v1@66.603,49.853 v1(66.603,49.877)
  Signal Layer 2 w0.5: v1(66.603,49.877) 66.603,52.972 65.7,53.875 65.7,63.925 66.625,64.85 67.641,64.85 69.877,62.614 69.877,62.598 71.6,60.875 73.275,60.875 v1(73.4,60.75)
  Bottom Layer w0.5: v1(66.603,49.877) 66.603,51.022 R9.1 R7.1 R4.1 ; U1.32 v1(73.4,60.75)
PWM: P1.2 U1.16 | length 7.8
  Bottom Layer w0.5: U1.16 83.025,53.725 83.85,52.9 83.85,47.45 P1.2
RESET: C3.2 R14.1 U1.29 | length 19.8
  Signal Layer 2 w0.5: v1@75.45,56.975 v1(75.4,56.925) 76.625,56.925 77.05,57.35 77.05,59.15 76.75,59.45 v1(76.75,67.85)
  Bottom Layer w0.5: C3.2 73.952,67.052 R14.1 74.136,67.004 74.982,67.85 v1(76.75,67.85) ; U1.29 v1(75.4,56.925)
RX: P2.4 U1.30 | length 21.3
  Signal Layer 2 w0.5: v1(68.025,69.9) 68.025,66.175 72.6,61.6 73.975,61.6 74.575,61 74.575,58.289 75.089,57.775 75.35,57.775 v1(75.4,57.725)
  Bottom Layer w0.5: v1(68.025,69.9) 69.25,71.125 P2.4 ; U1.30 v1(75.4,57.725)
TX: P2.3 U1.31 | length 21.1
  Signal Layer 2 w0.5: v1(69.3,69.85) 72.1,69.85 75.8,66.15 75.8,58.925 v1(75.4,58.525)
  Bottom Layer w0.5: v1(69.3,69.85) 70.75,71.3 P2.3 ; U1.31 v1(75.4,58.525)
VCC: C6.2 C7.2 C9.2 C10.2 C11.2 D4.1 D5.1 D6.1 pad.@63.6,72.475 R21.2 U2.1 U3.1 U4.4 U5.4 U8.1 U9.4 U11.2 | length 122.3
  Top Layer w0.3: v1(63.6,72.475) v1(64.556,72.475) v1(65.512,72.475)
  Top Layer w0.6: U11.2 67.66,64.41 C10.2 67.55,67.95 68,68.4 C11.2 72.1,72.475 ; R21.2 82.825,66.425 v1(82.825,68.05) 82.825,72.425 82.775,72.475
  Top Layer w4: v1(65.512,72.475) 72.1,72.475 82.775,72.475 101.075,72.475 U5.4
  Signal Layer 2 w0.5: v1(82.825,68.05) 82.825,67.275 83.425,66.675 83.425,60.525 82.475,59.575 82.475,53.125 85.55,50.05 v1(86.875,50.05)
  Bottom Layer w0.5: v1(86.875,50.05) C7.2 89.455,49.845 U3.1 ; C9.2 89.503,59.297 91.025,59.297 ; C6.2 89.55,68.75 U2.1 92.425,66.275 D4.1 92.4,65.575 91.025,64.2 91.025,59.297 ; D5.1 92.425,47.275 U3.1 ; 91.025,59.297 U8.1 92.425,56.775 D6.1 92.4,55.25 92.426,55.25 95.2,52.476 95.2,50.75 94.295,49.845 U3.1
  other v1: 61.688,71.5 62.644,71.5 63.6,71.5 64.556,71.5 65.512,71.5 61.688,72.475 62.644,72.475 61.688,73.45 62.644,73.45 63.6,73.45 64.556,73.45 65.512,73.45
X1: R6.1 U1.7 X1.1 | length 8.1
  Bottom Layer w0.254: R6.1@86.25,62.75 R6.1
  Bottom Layer w0.4: U1.7 79.65,61.405 80.995,62.75 X1.1 R6.1@86.25,62.75
X2: R6.2 U1.8 X1.3 | length 6.5
  Bottom Layer w0.254: R6.2@86.15,60.35 R6.2
  Bottom Layer w0.4: U1.8 81.025,60.2 83.85,60.2 X1.3 R6.2@86.15,60.35
pads on no net: BUZ1.0 U1.1 U1.2 U1.9 U1.17 U1.19 U1.21 U1.22 U11.1 U11.9
copper on no net:
  other v2: 72.95,62.675 74.05,62.675 72.95,63.775 74.05,63.775 72.95,64.875 74.05,64.875

## Polygon pours and split planes (outlines as drawn)
GND on Top Layer "Top Layer-GND" (solid, remove dead copper, pour order 12): 63.4,70 63.6,69.8 83.375,69.8 83.375,59.025 82.825,58.475 82.825,54.9 83.7,54.025 83.25,53.575 83.25,49.625 83.225,49.6 83.225,48.1 63.325,48.1 63.35,48.125 63.35,69.95
GND on Bottom Layer "Bottom Layer-GND" (solid, pour order 16): 66.95,74.375 67.004,74.429 105.204,74.429 105.204,45.404 105.15,45.35 104.575,45.925 66.65,45.925 66.65,74.3 66.775,74.425

## Keep-outs
Signal Layer 1:
  region: 97.875,56.5
Keep-Out Layer:
  lines w0.1: 198.247,113.284 198.374,113.157 ; 65,69.5 ccw(c64.5,69.5) 64.5,70 61,70 60.5,70 cw(c60.5,70.5) 60,70.5 60,71 60,74 cw(c61,74) 61,75 112,75 112,70 107,70 107,62.5 112,62.5 112,57.5 107,57.5 107,50 112,50 112,45 60,45 60,50 65,50 65,69.5 ; 65,69.5 65,69.5

## Other copper
Top Layer:
  rectangle net GND: 64.925,45.375 106.075,49.375
  rectangle net GND: 103.6,48.075 106.025,52.35
  rectangle net GND: 95.781,48.075 98.206,52.35
  rectangle net GND: 87.961,48.075 90.386,52.35
  rectangle net FAZ_3: 103.525,59.275 105.925,65.7
  rectangle net FAZ_2: 95.675,59.275 98.125,65.7
  rectangle net FAZ_1: 87.8,59.275 90.25,65.7
Signal Layer 1:
  rectangle net FAZ_2: 92.625,58.425 101.725,61.1
  rectangle net FAZ_2: 101.7,58.275 111.325,61.675
  region net FAZ_3: 105.471,56.114 ccw(c100.471,55.639) 99.996,55.639 99.996,45.989 ccw(c100.196,45.989) 100.196,45.789 111.146,45.789 ccw(c111.146,45.889) 111.246,45.889 111.246,49.239 105.446,49.239 cw(c105.446,49.264) 105.421,49.264 105.421,56.139
  region net FAZ_2: 92.625,58.425 92.625,54.525 97.526,54.525 ccw(c97.311,55.439) 98.25,55.439 98.25,58.425
  region net FAZ_1: 89.8,54.525 89.8,68.235 cw(c92.34,68.235) 92.34,70.775 111.275,70.775 ccw(c111.275,71.05) 111.55,71.05 111.55,73.525 ccw(c111.15,73.525) 111.15,73.925 87.231,73.925 ccw(c87.24,71.385) 84.7,71.385 84.7,54.1 ccw(c84.725,54.1) 84.75,54.1 89.776,54.1
  region: 89.4,54.5
  region: 89.8,54.75
  region: 97.7,56.8

## Silkscreen, mask and mechanical layers (free items; w line width, h text height)
Top Overlay:
  text "VCC" at 65.75,69.725 h0.4 r270
  text "GND" at 68.925,49.55 h0.4
Bottom Overlay:
  text "TX" at 70.525,73.775 h0.4 r270
  text "RX" at 69.05,73.725 h0.4 r270
  text "5V" at 73.725,73.7 h0.4 r270
  text "GND" at 67.475,73.65 h0.4 r270
  text "DTR" at 72.025,73.65 h0.4 r270
  text "FAZ_1" at 107.25,72.15 h0.4 r90
  text "VCC" at 65.275,69.05 h0.4 r270
  text "FAZ_2" at 107.175,59.95 h0.4 r90
  text "FAZ_3" at 107.225,47.8 h0.4 r90
  text "GND" at 66.85,46.775 h0.4 r270
  text "PWM" at 83.925,46.15 h0.3 r90
  text "GND" at 85.5,46.15 h0.3 r90
  text "5V" at 82.55,46.05 h0.4 r90
Top Solder:
  rectangle: 103.6,48.075 106.025,52.35
  rectangle: 95.781,48.075 98.206,52.35
  rectangle: 87.961,48.075 90.386,52.35
  rectangle: 64.925,45.375 106.075,49.375
  lines w4: 65.512,72.475 82.775,72.475 101.075,72.475

## Dimensions
112,75 to 112,45 on Top Overlay
60,74 to 112,75 on Top Overlay